# EAGLE board Dynamixel (EAGLE 9.6.2)
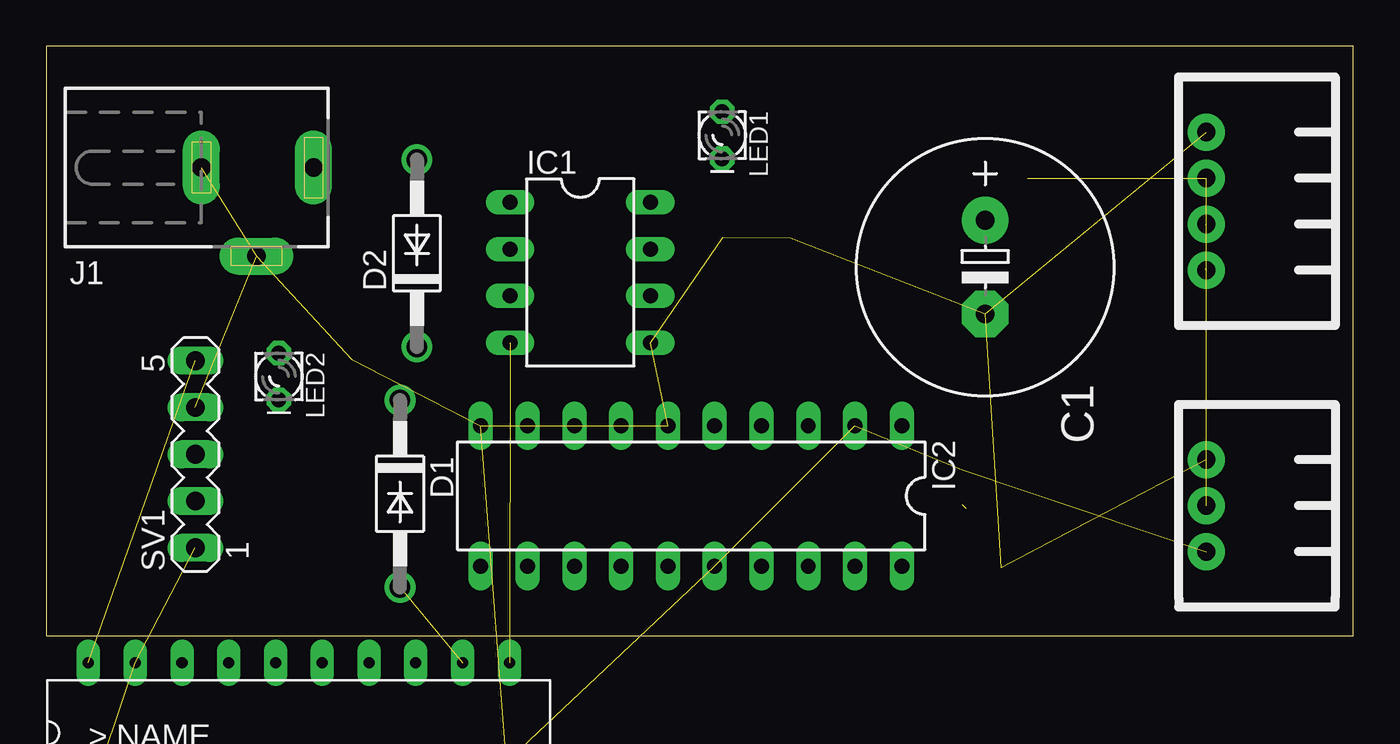
[diagram p0: board, top side]
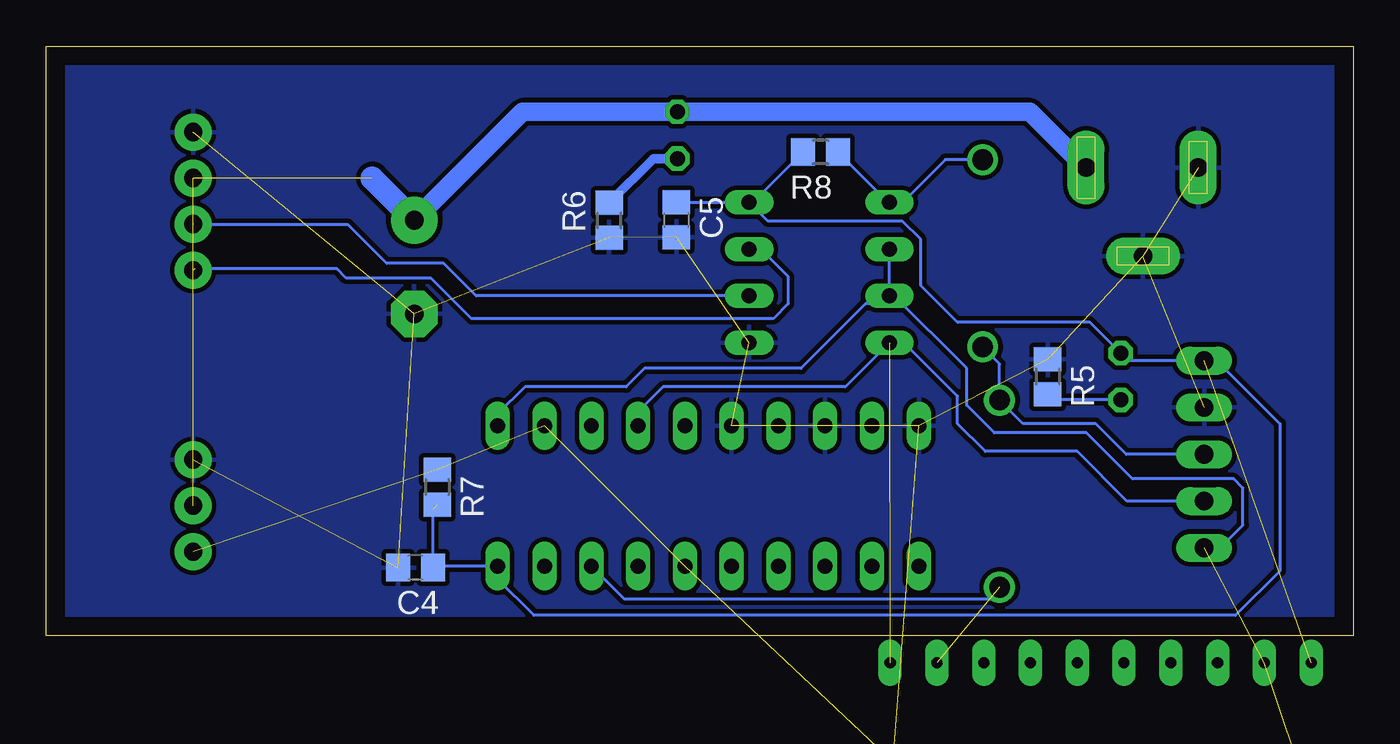
[diagram p1: board, bottom side, seen from below]

Size 71 x 32 mm. Coordinates in mm from the lower left corner, seen from the top.
Outline: 0,0 71,0 71,32 0,32 0,0
Copper layers (1*16): Top 0.035mm / dielectric 1.5mm / Bottom 0.035mm
Design rules "default": minimum track width 6mil, minimum drill 0.35mm, track to track 6mil, track to pad 6mil, pad to pad 6mil, via to via 6mil, smd to smd 6mil, copper to edge 40mil, drill to drill 6mil, minimum pad ring 10mil, minimum via ring 8mil, stop-mask expansion 4mil, vias tented up to drill 0mil, thermal gap 10mil

## Footprints (pad centres in the part's own frame; a part is rotated, then mirrored left to right if it is on the bottom)
E5-13 = drill 1.016 pad 2.54: + -2.54,0 | drill 1.016 pad 2.54 octagon: - 2.54,0
C0805 = smd 1.3 x 1.5: 1 -0.95,0; 2 0.95,0
DO41-10 = drill 1.118: A 5.08,0; C -5.08,0
DIL08 = drill 0.813 long: 1 -3.81,-3.81; 2 -1.27,-3.81; 3 1.27,-3.81; 4 3.81,-3.81; 5 3.81,3.81; 6 1.27,3.81; 7 -1.27,3.81; 8 -3.81,3.81
DIL20 = drill 0.813 long: 1 -11.43,-3.81; 2 -8.89,-3.81; 3 -6.35,-3.81; 4 -3.81,-3.81; 5 -1.27,-3.81; 6 1.27,-3.81; 7 3.81,-3.81; 8 6.35,-3.81; 9 8.89,-3.81; 10 11.43,-3.81; 11 11.43,3.81; 12 8.89,3.81; 13 6.35,3.81; 14 3.81,3.81; 15 1.27,3.81; 16 -1.27,3.81; 17 -3.81,3.81; 18 -6.35,3.81; 19 -8.89,3.81; 20 -11.43,3.81
DCJ0303 = drill 1 pad 2 long: 1 0,3.1; 2 4.8,0; 3 0,-3
LED_LD260 = drill 0.813 octagon: A -1.27,0; K 1.27,0
R0805 = smd 1.3 x 1.5: 1 -0.95,0; 2 0.95,0
MA05-1 = drill 1.016 long: 1 -5.08,0; 2 -2.54,0; 3 0,0; 4 2.54,0; 5 5.08,0
74LS241-N = drill 0.6 pad 1.27 long: 1A1 2.54,0; 1A2 7.62,0; 1A3 12.7,0; 1A4 17.78,0; 1Y1 5.08,7.62; 1Y2 10.16,7.62; 1Y3 15.24,7.62; 1Y4 20.32,7.62; 2A1 22.86,7.62; 2A2 17.78,7.62; 2A3 12.7,7.62; 2A4 7.62,7.62; 2G 2.54,7.62; 2Y1 20.32,0; 2Y2 15.24,0; 2Y3 10.16,0; 2Y4 5.08,0; GND 22.86,0; VCC 0,7.62 | drill 0.6 pad 2 square: 1G 0,0
DYN-RA-3 = drill 1 pad 2: DATA 5,0; GND 0,0; VIN 2.5,0
DYN-RA-4 = drill 1 pad 2: D+ 5,0; D- 7.5,0; GND 0,0; VIN 2.5,0

## Placement (x,y rotation side)
C1  2200u  [E5-13]  51,20 270 top
C4  100u  [C0805]  50.94,3.69 180 bottom
C5  100u  [C0805]  36.77,22.56 270 bottom
D1  1N4933  [DO41-10]  19.22,7.7 270 top
D2  1N4933  [DO41-10]  20.14,20.75 90 top
IC1  MAX3468CPA  [DIL08]  29.01,19.71 270 top
IC2  74LS241N  [DIL20]  35.04,7.58 180 top
J1  12V  [DCJ0303]  11.43,25.4 270 top
LED1  [LED_LD260]  36.72,27.16 270 top
LED2  [LED_LD260]  12.64,14.06 270 top
R5  1k  [R0805]  16.6,14.06 270 bottom
R6  1k  [R0805]  40.42,22.54 90 bottom
R7  10k  [R0805]  49.76,8.06 270 bottom
R8  10k  [R0805]  28.94,26.24 180 bottom
SV1  [MA05-1]  8.11,9.84 90 top
U3  74LS241-N  [74LS241-N]  2.3,-9.1 0 top
U$1  DYN-RA-3  [DYN-RA-3]  63.01,9.55 270 top
U$2  DYN-RA-4  [DYN-RA-4]  63.01,27.33 270 top

## Library data of the parts
C1 C4 C5 = rcl; SPICEPREFIX: C
D1 D2 = diode
IC1 = maxim; OC_FARNELL: unknown; OC_NEWARK: unknown
IC2 = 74xx-eu
J1 = con-jack; OC_FARNELL: unknown; OC_NEWARK: unknown
LED1 LED2 = eagle-ltspice; SPICEMODEL: NONE; SPICEPREFIX: D; SPICETYPE: diode
R5-R8 = resistor
SV1 = con-lstb; OC_FARNELL: unknown; OC_NEWARK: unknown
U3 U$1 U$2 = DynamixelLibrary

## Nets
12V: C1.+ J1.1 LED1.A U$1.VIN U$2.VIN
D+: IC1.6 U$2.D+
D-: IC1.7 U$2.D-
DATA: IC2.2 IC2.16 R7.1 U3.1A4 U3.2Y1 U$1.DATA
DIR: IC1.2 IC1.3 IC2.1 SV1.1 U3.1G U3.2G
GND: C1.- C4.2 C5.2 IC1.5 IC2.6 IC2.8 IC2.10 J1.2 J1.3 R5.1 R6.1 SV1.4 U3.GND U$1.GND U$2.GND
N$2: D2.A IC1.1 R8.1
N$5: D1.A IC2.18 U3.1Y4
N$6: LED1.K R6.2
N$7: LED2.K R5.2
RX: IC1.4 IC2.4 SV1.2 U3.2A1
TX: D1.C D2.C SV1.3
VCC: C4.1 C5.1 IC1.8 IC2.20 LED2.A R7.2 R8.2 SV1.5 U3.VCC

## Tracks (layer width: path | path; a pad name or v marks a point on that pad's centre or on a via)
12V  (2 unrouted)
  Bottom 1.016: J1.1 17.56,28.43 LED1.A 45.11,28.43 C1.+
  Bottom 1.27: 53.29,24.83 C1.+
D+  (1 unrouted)
  Bottom 0.152: IC1.6 47.64,18.44 49.4,20.2 52.5,20.2 54.6,22.3 62.98,22.3
D-  (1 unrouted)
  Bottom 0.152: IC1.7 32.18,20.98 30.7,19.5 30.7,18 31.5,17.2 47.9,17.2 50.1,19.4 54.7,19.4 55.2,19.9 62.94,19.9
DATA  (5 unrouted)
DIR  (2 unrouted)
  Bottom 0.152: 25.2,18.5 IC1.3 25.64,18 26.5,18 30,14.5 38.5,14.5 39.5,13.5 45,13.5 46.5,12 46.47,11.97 IC2.1 | 25.2,18.5 IC1.2 | SV1.1 7.24,4.76 6,6 6,8 6.5,8.5 12,8.5 14.5,11 19.5,11 21,12.5 21,14.5 25,18.5 25.2,18.5
GND  (14 unrouted)
  pour Bottom (isolate 0.254): 0.2,0.3 0.3,0.2 70.7,0.2 70.8,0.3 70.8,31.7 0.2,31.7
N$2
  Bottom 0.152: D2.A 22.17,25.83 24.5,23.5 25.18,23.5 IC1.1 25.27,23.52 R8.1
N$5  (1 unrouted)
  Bottom 0.152: IC2.18 39.62,2 19.5,2 19.22,2.28 D1.A
N$6
  Bottom 0.508: LED1.K 38.02,25.89 R6.2
N$7
  Bottom 0.152: LED2.K 16.28,12.79 R5.2
RX  (1 unrouted)
  Bottom 0.152: SV1.2 12.3,7.3 15,10 20,10 21.5,11.5 21.5,13 24.4,15.9 IC1.4 27.6,13.5 37.5,13.5 38.85,12.15 IC2.4
TX
  Bottom 0.152: SV1.3 12.34,9.84 14,11.5 17.94,11.5 D1.C 19.22,14.75 D2.C
VCC  (2 unrouted)
  Bottom 0.152: IC2.20 46.5,3.77 | 46.5,3.77 49.91,3.77 C4.1 49.99,6.88 | IC1.8 31.8,22.5 24.5,22.5 23.5,21.5 23.5,19 21.5,17 14.31,17 LED2.A 12.23,14.92 SV1.5 7.42,14.92 4,11.5 4,3.5 6.41,1.09 44.5,1.09 46.5,3.09 46.5,3.77 | C5.1 IC1.8 | R8.2 32.61,23.52 IC1.8